# EAGLE board SparkFun_Lil_Soundie_Audio_Player-Panel_v10 (EAGLE 7.7.0), part 1 of 7
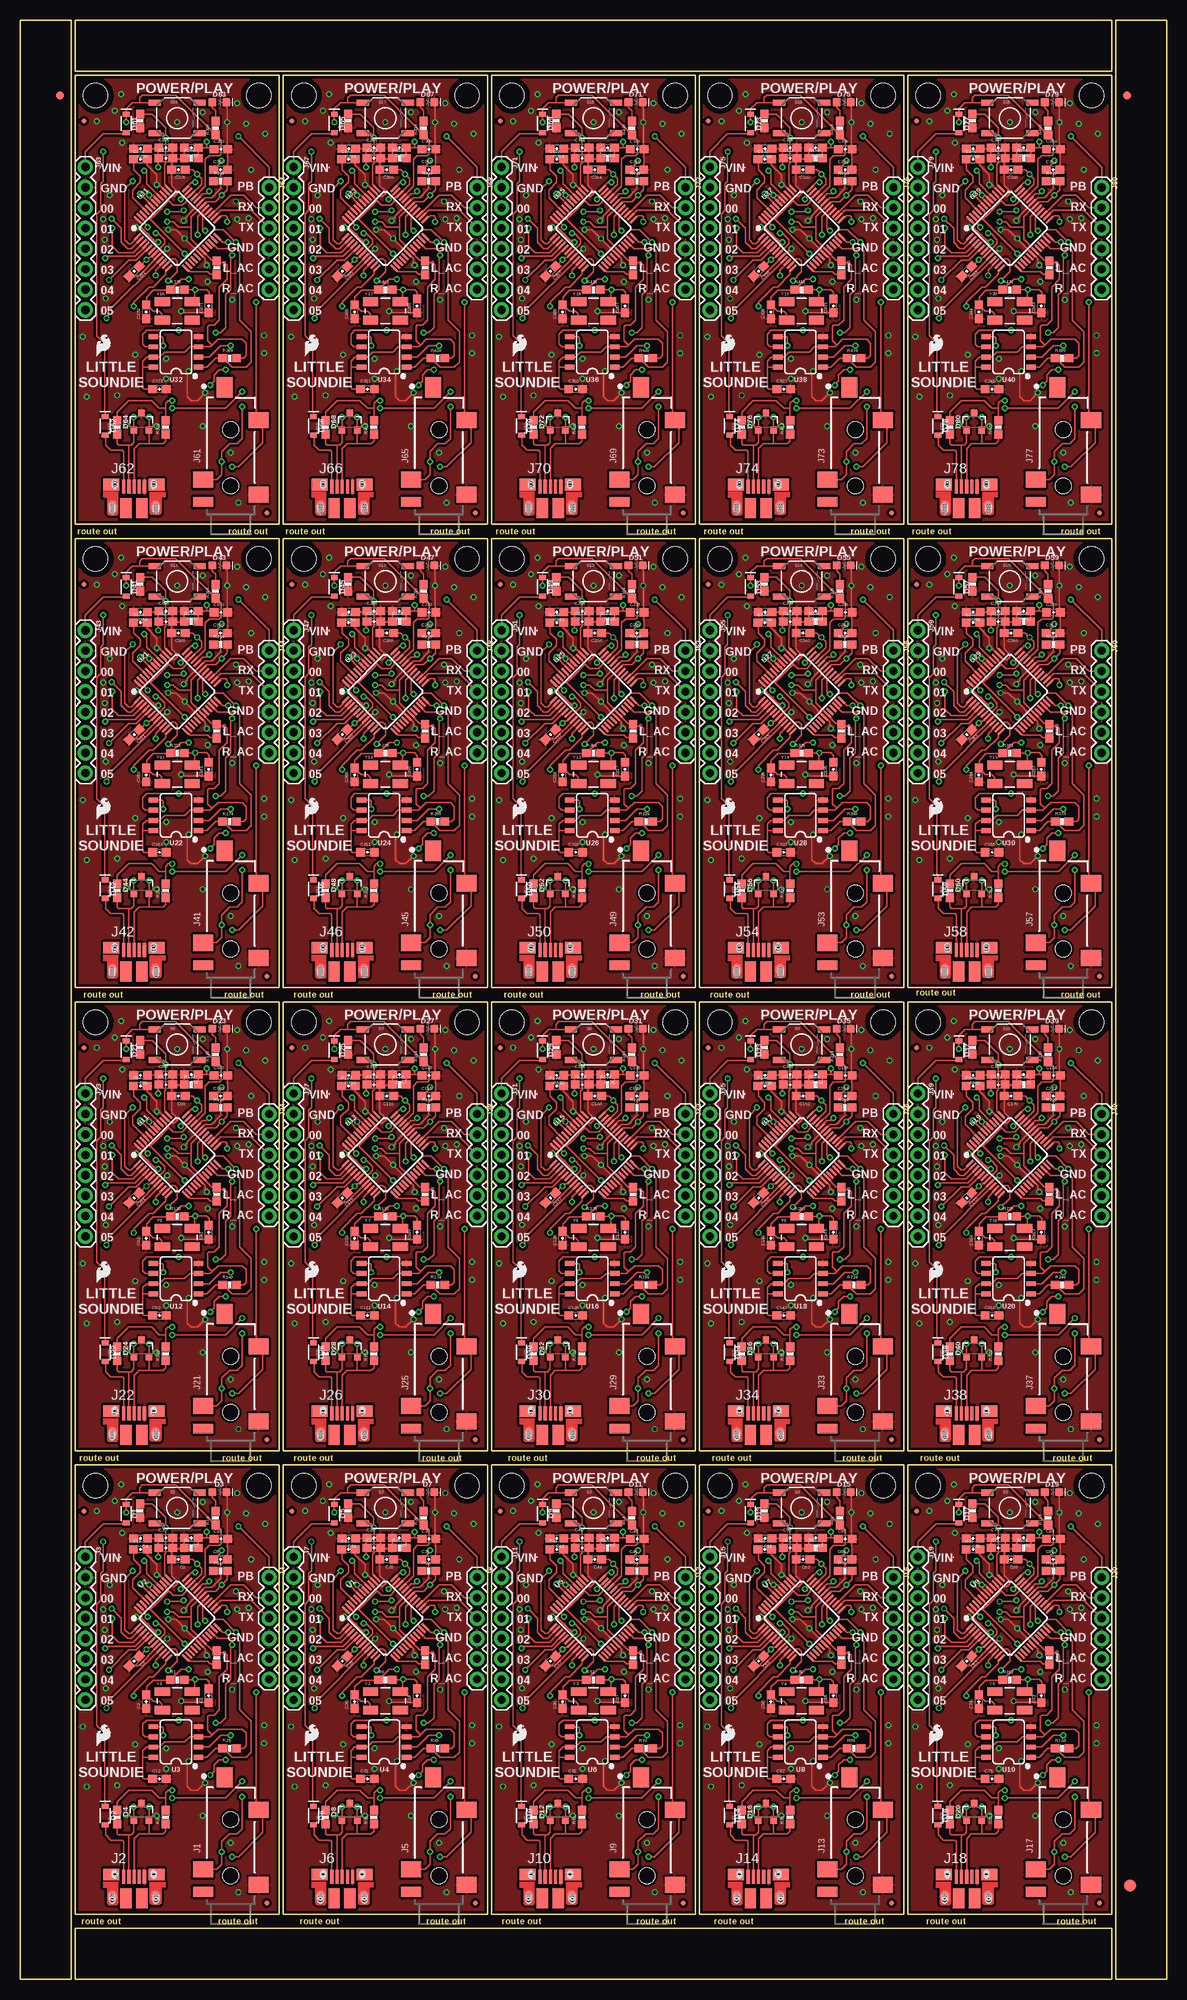
[diagram p0: board, top side]
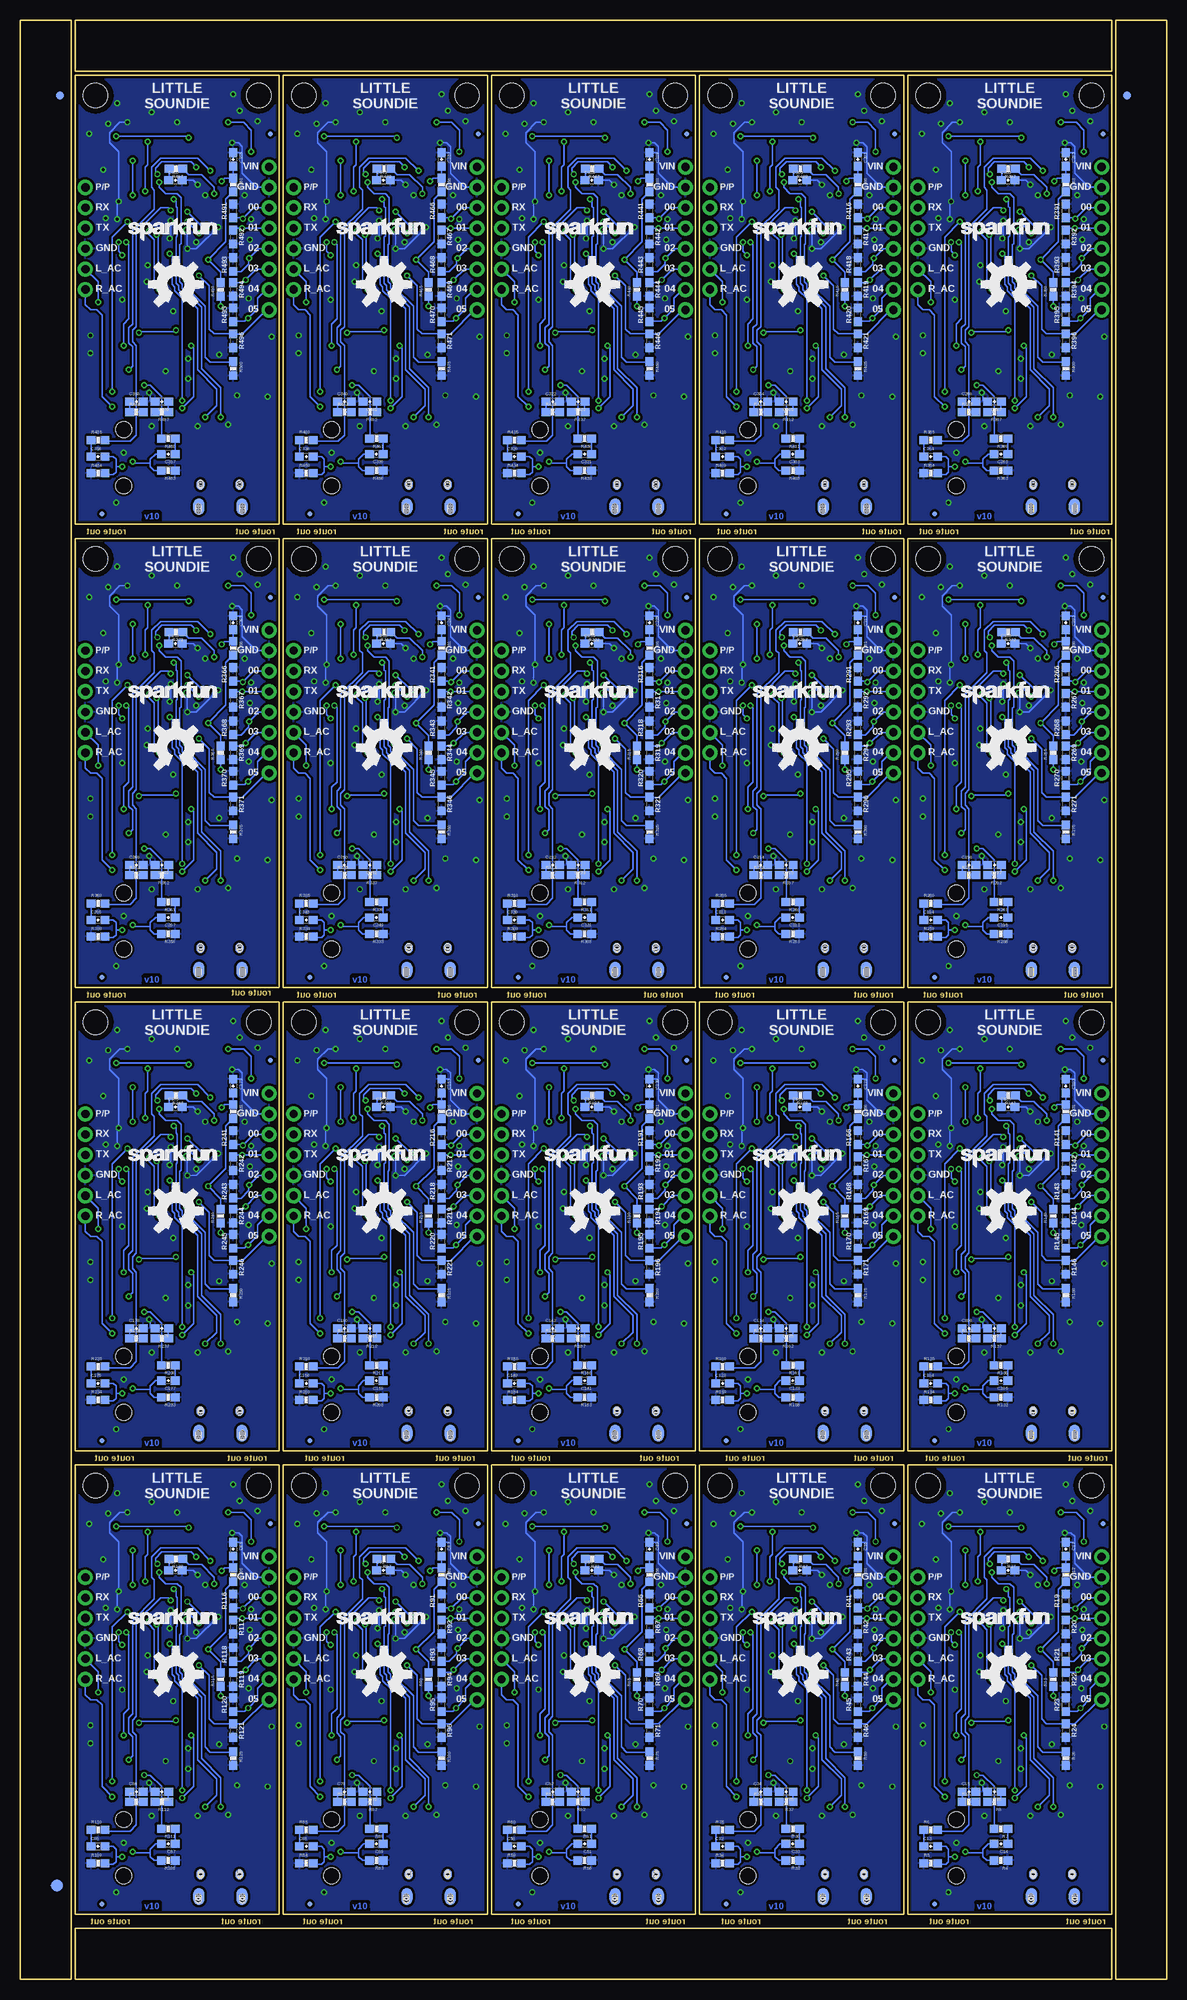
[diagram p1: board, bottom side, seen from below]

Size 142.75 x 243.84 mm. Coordinates in mm from the lower left corner, seen from the top.
Outline: 6.35,80.52 6.35,0 0,0 0,30.99
Outline: 0,28.45 0,243.84 6.35,243.84 6.35,77.98
Outline: 79.25,0 6.86,0 6.86,6.35 29.72,6.35
Outline: 27.18,6.35 135.89,6.35 135.89,0 76.71,0
Outline: 63.5,243.84 135.89,243.84 135.89,237.49 113.03,237.49
Outline: 115.57,237.49 6.86,237.49 6.86,243.84 66.04,243.84
Outline: 136.4,164.59 136.4,243.84 142.75,243.84 142.75,214.12
Outline: 142.75,216.66 142.75,0 136.4,0 136.4,167.13
Outline: 32.26,8.13 32.26,64.01 6.86,64.01 6.86,8.13 32.26,8.13
Outline: 58.17,8.13 58.17,64.01 32.77,64.01 32.77,8.13 58.17,8.13
Outline: 84.07,8.13 84.07,64.01 58.67,64.01 58.67,8.13 84.07,8.13
Outline: 109.98,8.13 109.98,64.01 84.58,64.01 84.58,8.13 109.98,8.13
Outline: 135.89,8.13 135.89,64.01 110.49,64.01 110.49,8.13 135.89,8.13
Outline: 32.26,65.79 32.26,121.67 6.86,121.67 6.86,65.79 32.26,65.79
Outline: 58.17,65.79 58.17,121.67 32.77,121.67 32.77,65.79 58.17,65.79
Outline: 84.07,65.79 84.07,121.67 58.67,121.67 58.67,65.79 84.07,65.79
Outline: 109.98,65.79 109.98,121.67 84.58,121.67 84.58,65.79 109.98,65.79
Outline: 135.89,65.79 135.89,121.67 110.49,121.67 110.49,65.79 135.89,65.79
Outline: 32.26,123.44 32.26,179.32 6.86,179.32 6.86,123.44 32.26,123.44
Outline: 58.17,123.44 58.17,179.32 32.77,179.32 32.77,123.44 58.17,123.44
Outline: 84.07,123.44 84.07,179.32 58.67,179.32 58.67,123.44 84.07,123.44
Outline: 109.98,123.44 109.98,179.32 84.58,179.32 84.58,123.44 109.98,123.44
Outline: 135.89,123.44 135.89,179.32 110.49,179.32 110.49,123.44 135.89,123.44
Outline: 32.26,181.1 32.26,236.98 6.86,236.98 6.86,181.1 32.26,181.1
Outline: 58.17,181.1 58.17,236.98 32.77,236.98 32.77,181.1 58.17,181.1
Outline: 84.07,181.1 84.07,236.98 58.67,236.98 58.67,181.1 84.07,181.1
Outline: 109.98,181.1 109.98,236.98 84.58,236.98 84.58,181.1 109.98,181.1
Outline: 135.89,181.1 135.89,236.98 110.49,236.98 110.49,181.1 135.89,181.1
Copper layers (1*16): Top 0.035mm / dielectric 1.5mm / Bottom 0.035mm
Design rules "SparkFun-2-layer-TIGHT": minimum track width 7mil, minimum drill 15mil, track to track 7mil, track to pad 7mil, pad to pad 7mil, via to via 7mil, smd to smd 7mil, copper to edge 7mil, drill to drill 7mil, minimum pad ring 7mil, minimum via ring 7mil, stop-mask expansion 4mil, vias tented up to drill 25mil, thermal gap 10mil

## Footprints (pad centres in the part's own frame; a part is rotated, then mirrored left to right if it is on the bottom)
0603-CAP = smd 1.1 x 1: 1 -0.85,0; 2 0.85,0
SOD-323 = smd 0.63 x 0.83: A 1.15,0; C -1.15,0
LED-0603 = smd 1 x 1: A -0.877,0; C 0.877,0
SOT23-3 = smd 0.8 x 0.9: 1 -0.95,-1; 2 0.95,-1; 3 0,1.1
FIDUCIAL-1X2 = smd 1 x 1: 1 0,0
FIDUCIAL-1.5X3 = smd 1.5 x 1.5: 1 0,0
FIDUCIAL-MICRO = smd 0.635 x 0.635: 1 0,0
STAND-OFF-TIGHT = hole 3.048: 0,0
AUDIO-JACK-3.5MM-SMD = smd 2 x 2.5: RING 4.3,3.45; SLEEVE 2.4,-3.45; TIP 11.7,-3.45 | smd 1.2 x 2.5: RSH 1.5,3.45 | smd 2.5 x 2: TSH 15.75,0.75 | hole 2: 3.5,0; 10.5,0
USB-MICROB-PTH = smd 0.4 x 1.75: D+ 0.031,1.331; D- -0.619,1.331; GND 1.331,1.331; ID 0.681,1.331; VBUS -1.269,1.331 | smd 1.4 x 2.1 bottom: P$1 2.701,-1.142; P$3 -2.659,-1.144 | smd 1 x 1.3: P$2 2.487,1.594; P$6 -2.368,1.604 | smd 1 x 1.3 bottom: P$4 -2.368,1.604; P$10 2.481,1.598 | smd 1.1 x 1.5: P$8 2.701,-1.142; P$12 -2.659,-1.144 | smd 2 x 1.46: SHEILD2 2.831,1.606; SHIELD -2.794,1.606 | smd 1.425 x 2.5: SHIELD3 -0.979,-1.349; SHIELD4 0.996,-1.352 | hole 0.7: -2.693,-1.134; -2.693,-1.3; -2.694,-1.499; -2.694,-1.664; 2.768,-1.134; 2.767,-1.303; 2.766,-1.496; 2.766,-1.664 | hole 0.66: -2.359,1.821; -2.349,1.691; -2.359,1.541; -2.354,1.432; 2.481,1.821; 2.491,1.691; 2.481,1.541; 2.486,1.432
1X08 = drill 1.016 pad 1.88: 1 0,0; 2 2.54,0; 3 5.08,0; 4 7.62,0; 5 10.16,0; 6 12.7,0; 7 15.24,0; 8 17.78,0
1X06 = drill 1.016 pad 1.88: 1 0,0; 2 2.54,0; 3 5.08,0; 4 7.62,0; 5 10.16,0; 6 12.7,0
0603-RES = smd 1.1 x 1: 1 -0.85,0; 2 0.85,0
0603 = smd 1.1 x 1: 1 -0.85,0; 2 0.85,0
TACTILE-SWITCH-SMD = smd 1.524 x 0.762: 1 -2.794,1.905; 2 2.794,1.905; 3 -2.794,-1.905; 4 2.794,-1.905
LQFP-48 = smd 0.254 x 1.143: 1 -2.75,-4.25; 2 -2.25,-4.25; 3 -1.75,-4.25; 4 -1.25,-4.25; 5 -0.75,-4.25; 6 -0.25,-4.25; 7 0.25,-4.25; 8 0.75,-4.25; 9 1.25,-4.25; 10 1.75,-4.25; 11 2.25,-4.25; 12 2.75,-4.25; 25 2.75,4.25; 26 2.25,4.25; 27 1.75,4.25; 28 1.25,4.25; 29 0.75,4.25; 30 0.25,4.25; 31 -0.25,4.25; 32 -0.75,4.25; 33 -1.25,4.25; 34 -1.75,4.25; 35 -2.25,4.25; 36 -2.75,4.25 | smd 1.143 x 0.254: 13 4.25,-2.75; 14 4.25,-2.25; 15 4.25,-1.75; 16 4.25,-1.25; 17 4.25,-0.75; 18 4.25,-0.25; 19 4.25,0.25; 20 4.25,0.75; 21 4.25,1.25; 22 4.25,1.75; 23 4.25,2.25; 24 4.25,2.75; 37 -4.25,2.75; 38 -4.25,2.25; 39 -4.25,1.75; 40 -4.25,1.25; 41 -4.25,0.75; 42 -4.25,0.25; 43 -4.25,-0.25; 44 -4.25,-0.75; 45 -4.25,-1.25; 46 -4.25,-1.75; 47 -4.25,-2.25; 48 -4.25,-2.75
SO08 = smd 0.6 x 1.2: 1 -1.905,-2.8; 2 -0.635,-2.8; 3 0.635,-2.8; 4 1.905,-2.8; 5 1.905,2.8; 6 0.635,2.8; 7 -0.635,2.8; 8 -1.905,2.8
CRYSTAL-SMD-5X3 = smd 1.9 x 1.1: 1 -1.85,-1.15; 2 1.85,-1.15; 3 1.85,1.15; 4 -1.85,1.15

## Placement (x,y rotation side)
C1  22pF  [0603-CAP]  23.5,35.31 90 top
C2  22pF  [0603-CAP]  15.72,34.58 90 top
C3  10uF  [0603-CAP]  18.13,54.96 0 top
C4  0.1uF  [0603-CAP]  15.01,54.87 180 top
C5  0.1uF  [0603-CAP]  18.13,53.69 0 top
C6  0.1uF  [0603-CAP]  19.72,52.26 180 top
C7  0.1uF  [0603-CAP]  21.3,54.96 180 top
C8  0.1uF  [0603-CAP]  24.96,52.26 0 top
C9  0.1uF  [0603-CAP]  14.2,39.6 225 top
C10  1.0uF  [0603-CAP]  24.99,54.82 0 top
C11  1.0uF  [0603-CAP]  14.96,53.55 0 top
C12  0.1uF  [0603-CAP]  17.34,24.96 0 top
C13  10uF  [0603-CAP]  29.4,16.54 0 bottom
C14  10uF  [0603-CAP]  20.67,16.86 180 bottom
C15  10nF  [0603-CAP]  24.64,23.37 0 bottom
C16  10nF  [0603-CAP]  21.46,23.37 180 bottom
C17  10uF  [0603-CAP]  12.57,53.53 270 bottom
C18  22pF  [0603-CAP]  49.4,35.31 90 top
C19  47nF  [0603-CAP]  19.78,50.93 0 bottom
C20  22pF  [0603-CAP]  41.62,34.58 90 top
C21  0.1uF  [0603-CAP]  43.24,24.96 0 top
C22  1.0uF  [0603-CAP]  40.87,53.55 0 top
C23  10uF  [0603-CAP]  44.04,54.96 0 top
C24  0.1uF  [0603-CAP]  40.92,54.87 180 top
C25  0.1uF  [0603-CAP]  44.04,53.69 0 top
C26  0.1uF  [0603-CAP]  45.62,52.26 180 top
C27  0.1uF  [0603-CAP]  47.21,54.96 180 top
C28  0.1uF  [0603-CAP]  50.86,52.26 0 top
C29  0.1uF  [0603-CAP]  40.11,39.6 225 top
C30  1.0uF  [0603-CAP]  50.9,54.82 0 top
C31  10uF  [0603-CAP]  38.48,53.53 270 bottom
C32  10uF  [0603-CAP]  55.31,16.54 0 bottom
C33  10uF  [0603-CAP]  46.58,16.86 180 bottom
C34  10nF  [0603-CAP]  50.55,23.37 0 bottom
C35  10nF  [0603-CAP]  47.37,23.37 180 bottom
C36  47nF  [0603-CAP]  45.69,50.93 0 bottom
C37  22pF  [0603-CAP]  75.31,35.31 90 top
C38  22pF  [0603-CAP]  67.53,34.58 90 top
C39  0.1uF  [0603-CAP]  69.15,24.96 0 top
C40  1.0uF  [0603-CAP]  66.78,53.55 0 top
C41  10uF  [0603-CAP]  69.95,54.96 0 top
C42  0.1uF  [0603-CAP]  66.82,54.87 180 top
C43  0.1uF  [0603-CAP]  69.95,53.69 0 top
C44  0.1uF  [0603-CAP]  71.53,52.26 180 top
C45  0.1uF  [0603-CAP]  73.12,54.96 180 top
C46  0.1uF  [0603-CAP]  76.77,52.26 0 top
C47  0.1uF  [0603-CAP]  66.02,39.6 225 top
C48  1.0uF  [0603-CAP]  76.8,54.82 0 top
C49  10uF  [0603-CAP]  64.39,53.53 270 bottom
C50  10uF  [0603-CAP]  81.22,16.54 0 bottom
C51  10uF  [0603-CAP]  72.49,16.86 180 bottom
C52  10nF  [0603-CAP]  76.45,23.37 0 bottom
C53  10nF  [0603-CAP]  73.28,23.37 180 bottom
C54  47nF  [0603-CAP]  71.6,50.93 0 bottom
C55  22pF  [0603-CAP]  101.22,35.31 90 top
C56  22pF  [0603-CAP]  93.44,34.58 90 top
C57  0.1uF  [0603-CAP]  95.06,24.96 0 top
C58  1.0uF  [0603-CAP]  92.69,53.55 0 top
C59  10uF  [0603-CAP]  95.85,54.96 0 top
C60  0.1uF  [0603-CAP]  92.73,54.87 180 top
C61  0.1uF  [0603-CAP]  95.85,53.69 0 top
C62  0.1uF  [0603-CAP]  97.44,52.26 180 top
C63  0.1uF  [0603-CAP]  99.03,54.96 180 top
C64  0.1uF  [0603-CAP]  102.68,52.26 0 top
C65  0.1uF  [0603-CAP]  91.93,39.6 225 top
C66  1.0uF  [0603-CAP]  102.71,54.82 0 top
C67  10uF  [0603-CAP]  90.3,53.53 270 bottom
C68  10uF  [0603-CAP]  107.12,16.54 0 bottom
C69  10uF  [0603-CAP]  98.39,16.86 180 bottom
C70  10nF  [0603-CAP]  102.36,23.37 0 bottom
C71  10nF  [0603-CAP]  99.19,23.37 180 bottom
C72  47nF  [0603-CAP]  97.5,50.93 0 bottom
C73  22pF  [0603-CAP]  127.13,35.31 90 top
C74  22pF  [0603-CAP]  119.35,34.58 90 top
C75  0.1uF  [0603-CAP]  120.97,24.96 0 top
C76  1.0uF  [0603-CAP]  118.59,53.55 0 top
C77  10uF  [0603-CAP]  121.76,54.96 0 top
C78  0.1uF  [0603-CAP]  118.64,54.87 180 top
C79  0.1uF  [0603-CAP]  121.76,53.69 0 top
C80  0.1uF  [0603-CAP]  123.35,52.26 180 top
C81  0.1uF  [0603-CAP]  124.94,54.96 180 top
C82  0.1uF  [0603-CAP]  128.59,52.26 0 top
C83  0.1uF  [0603-CAP]  117.84,39.6 225 top
C84  1.0uF  [0603-CAP]  128.62,54.82 0 top
C85  10uF  [0603-CAP]  116.2,53.53 270 bottom
C86  10uF  [0603-CAP]  133.03,16.54 0 bottom
C87  10uF  [0603-CAP]  124.3,16.86 180 bottom
C88  10nF  [0603-CAP]  128.27,23.37 0 bottom
C89  10nF  [0603-CAP]  125.09,23.37 180 bottom
C90  47nF  [0603-CAP]  123.41,50.93 0 bottom
C91  22pF  [0603-CAP]  23.5,92.96 90 top
C92  22pF  [0603-CAP]  15.72,92.23 90 top
C93  0.1uF  [0603-CAP]  17.34,82.61 0 top
C94  1.0uF  [0603-CAP]  14.96,111.2 0 top
C95  10uF  [0603-CAP]  18.13,112.62 0 top
C96  0.1uF  [0603-CAP]  15.01,112.53 180 top
C97  0.1uF  [0603-CAP]  18.13,111.35 0 top
C98  0.1uF  [0603-CAP]  19.72,109.92 180 top
C99  0.1uF  [0603-CAP]  21.3,112.62 180 top
C100  0.1uF  [0603-CAP]  24.96,109.92 0 top
C101  0.1uF  [0603-CAP]  14.2,97.26 225 top
C102  1.0uF  [0603-CAP]  24.99,112.47 0 top
C103  10uF  [0603-CAP]  12.57,111.19 270 bottom
C104  10uF  [0603-CAP]  29.4,74.2 0 bottom
C105  10uF  [0603-CAP]  20.67,74.52 180 bottom
C106  10nF  [0603-CAP]  24.64,81.03 0 bottom
C107  10nF  [0603-CAP]  21.46,81.03 180 bottom
C108  47nF  [0603-CAP]  19.78,108.58 0 bottom
C109  22pF  [0603-CAP]  49.4,92.96 90 top
C110  22pF  [0603-CAP]  41.62,92.23 90 top
C111  0.1uF  [0603-CAP]  43.24,82.61 0 top
C112  1.0uF  [0603-CAP]  40.87,111.2 0 top
C113  10uF  [0603-CAP]  44.04,112.62 0 top
C114  0.1uF  [0603-CAP]  40.92,112.53 180 top
C115  0.1uF  [0603-CAP]  44.04,111.35 0 top
C116  0.1uF  [0603-CAP]  45.62,109.92 180 top
C117  0.1uF  [0603-CAP]  47.21,112.62 180 top
C118  0.1uF  [0603-CAP]  50.86,109.92 0 top
C119  0.1uF  [0603-CAP]  40.11,97.26 225 top
C120  1.0uF  [0603-CAP]  50.9,112.47 0 top
C121  10uF  [0603-CAP]  38.48,111.19 270 bottom
C122  10uF  [0603-CAP]  55.31,74.2 0 bottom
C123  10uF  [0603-CAP]  46.58,74.52 180 bottom
C124  10nF  [0603-CAP]  50.55,81.03 0 bottom
C125  10nF  [0603-CAP]  47.37,81.03 180 bottom
C126  47nF  [0603-CAP]  45.69,108.58 0 bottom
C127  22pF  [0603-CAP]  75.31,92.96 90 top
C128  22pF  [0603-CAP]  67.53,92.23 90 top
C129  0.1uF  [0603-CAP]  69.15,82.61 0 top
C130  1.0uF  [0603-CAP]  66.78,111.2 0 top
C131  10uF  [0603-CAP]  69.95,112.62 0 top
C132  0.1uF  [0603-CAP]  66.82,112.53 180 top
C133  0.1uF  [0603-CAP]  69.95,111.35 0 top
C134  0.1uF  [0603-CAP]  71.53,109.92 180 top
C135  0.1uF  [0603-CAP]  73.12,112.62 180 top
C136  0.1uF  [0603-CAP]  76.77,109.92 0 top
C137  0.1uF  [0603-CAP]  66.02,97.26 225 top
C138  1.0uF  [0603-CAP]  76.8,112.47 0 top
C139  10uF  [0603-CAP]  64.39,111.19 270 bottom
C140  10uF  [0603-CAP]  81.22,74.2 0 bottom
C141  10uF  [0603-CAP]  72.49,74.52 180 bottom
C142  10nF  [0603-CAP]  76.45,81.03 0 bottom
C143  10nF  [0603-CAP]  73.28,81.03 180 bottom
C144  47nF  [0603-CAP]  71.6,108.58 0 bottom
C145  22pF  [0603-CAP]  101.22,92.96 90 top
C146  22pF  [0603-CAP]  93.44,92.23 90 top
C147  0.1uF  [0603-CAP]  95.06,82.61 0 top
C148  1.0uF  [0603-CAP]  92.69,111.2 0 top
C149  10uF  [0603-CAP]  95.85,112.62 0 top
C150  0.1uF  [0603-CAP]  92.73,112.53 180 top
C151  0.1uF  [0603-CAP]  95.85,111.35 0 top
C152  0.1uF  [0603-CAP]  97.44,109.92 180 top
C153  0.1uF  [0603-CAP]  99.03,112.62 180 top
C154  0.1uF  [0603-CAP]  102.68,109.92 0 top
C155  0.1uF  [0603-CAP]  91.93,97.26 225 top
C156  1.0uF  [0603-CAP]  102.71,112.47 0 top
C157  10uF  [0603-CAP]  90.3,111.19 270 bottom
C158  10uF  [0603-CAP]  107.12,74.2 0 bottom
C159  10uF  [0603-CAP]  98.39,74.52 180 bottom
C160  10nF  [0603-CAP]  102.36,81.03 0 bottom
C161  10nF  [0603-CAP]  99.19,81.03 180 bottom
C162  47nF  [0603-CAP]  97.5,108.58 0 bottom
C163  22pF  [0603-CAP]  127.13,92.96 90 top
C164  22pF  [0603-CAP]  119.35,92.23 90 top
C165  0.1uF  [0603-CAP]  120.97,82.61 0 top
C166  1.0uF  [0603-CAP]  118.59,111.2 0 top
C167  10uF  [0603-CAP]  121.76,112.62 0 top
C168  0.1uF  [0603-CAP]  118.64,112.53 180 top
C169  0.1uF  [0603-CAP]  121.76,111.35 0 top
C170  0.1uF  [0603-CAP]  123.35,109.92 180 top
C171  0.1uF  [0603-CAP]  124.94,112.62 180 top
C172  0.1uF  [0603-CAP]  128.59,109.92 0 top
C173  0.1uF  [0603-CAP]  117.84,97.26 225 top
C174  1.0uF  [0603-CAP]  128.62,112.47 0 top
C175  10uF  [0603-CAP]  116.2,111.19 270 bottom
C176  10uF  [0603-CAP]  133.03,74.2 0 bottom
C177  10uF  [0603-CAP]  124.3,74.52 180 bottom
C178  10nF  [0603-CAP]  128.27,81.03 0 bottom
C179  10nF  [0603-CAP]  125.09,81.03 180 bottom
C180  47nF  [0603-CAP]  123.41,108.58 0 bottom
C181  22pF  [0603-CAP]  23.5,150.62 90 top
C182  22pF  [0603-CAP]  15.72,149.89 90 top
C183  0.1uF  [0603-CAP]  17.34,140.27 0 top
C184  1.0uF  [0603-CAP]  14.96,168.86 0 top
C185  10uF  [0603-CAP]  18.13,170.28 0 top
C186  0.1uF  [0603-CAP]  15.01,170.18 180 top
C187  0.1uF  [0603-CAP]  18.13,169.01 0 top
C188  0.1uF  [0603-CAP]  19.72,167.58 180 top
C189  0.1uF  [0603-CAP]  21.3,170.28 180 top
C190  0.1uF  [0603-CAP]  24.96,167.58 0 top
C191  0.1uF  [0603-CAP]  14.2,154.92 225 top
C192  1.0uF  [0603-CAP]  24.99,170.13 0 top
C193  10uF  [0603-CAP]  12.57,168.85 270 bottom
C194  10uF  [0603-CAP]  29.4,131.86 0 bottom
C195  10uF  [0603-CAP]  20.67,132.18 180 bottom
C196  10nF  [0603-CAP]  24.64,138.68 0 bottom
C197  10nF  [0603-CAP]  21.46,138.68 180 bottom
C198  47nF  [0603-CAP]  19.78,166.24 0 bottom
C199  22pF  [0603-CAP]  49.4,150.62 90 top
C200  22pF  [0603-CAP]  41.62,149.89 90 top
C201  0.1uF  [0603-CAP]  43.24,140.27 0 top
C202  1.0uF  [0603-CAP]  40.87,168.86 0 top
C203  10uF  [0603-CAP]  44.04,170.28 0 top
C204  0.1uF  [0603-CAP]  40.92,170.18 180 top
C205  0.1uF  [0603-CAP]  44.04,169.01 0 top
C206  0.1uF  [0603-CAP]  45.62,167.58 180 top
C207  0.1uF  [0603-CAP]  47.21,170.28 180 top
C208  0.1uF  [0603-CAP]  50.86,167.58 0 top
C209  0.1uF  [0603-CAP]  40.11,154.92 225 top
C210  1.0uF  [0603-CAP]  50.9,170.13 0 top
C211  10uF  [0603-CAP]  38.48,168.85 270 bottom
C212  10uF  [0603-CAP]  55.31,131.86 0 bottom
C213  10uF  [0603-CAP]  46.58,132.18 180 bottom
C214  10nF  [0603-CAP]  50.55,138.68 0 bottom
C215  10nF  [0603-CAP]  47.37,138.68 180 bottom
C216  47nF  [0603-CAP]  45.69,166.24 0 bottom
C217  22pF  [0603-CAP]  75.31,150.62 90 top
C218  22pF  [0603-CAP]  67.53,149.89 90 top
C219  0.1uF  [0603-CAP]  69.15,140.27 0 top
C220  1.0uF  [0603-CAP]  66.78,168.86 0 top
C221  10uF  [0603-CAP]  69.95,170.28 0 top
C222  0.1uF  [0603-CAP]  66.82,170.18 180 top
C223  0.1uF  [0603-CAP]  69.95,169.01 0 top
C224  0.1uF  [0603-CAP]  71.53,167.58 180 top
C225  0.1uF  [0603-CAP]  73.12,170.28 180 top
C226  0.1uF  [0603-CAP]  76.77,167.58 0 top
C227  0.1uF  [0603-CAP]  66.02,154.92 225 top
C228  1.0uF  [0603-CAP]  76.8,170.13 0 top
C229  10uF  [0603-CAP]  64.39,168.85 270 bottom
C230  10uF  [0603-CAP]  81.22,131.86 0 bottom
C231  10uF  [0603-CAP]  72.49,132.18 180 bottom
C232  10nF  [0603-CAP]  76.45,138.68 0 bottom
C233  10nF  [0603-CAP]  73.28,138.68 180 bottom
C234  47nF  [0603-CAP]  71.6,166.24 0 bottom
C235  22pF  [0603-CAP]  101.22,150.62 90 top
C236  22pF  [0603-CAP]  93.44,149.89 90 top
C237  0.1uF  [0603-CAP]  95.06,140.27 0 top
C238  1.0uF  [0603-CAP]  92.69,168.86 0 top
C239  10uF  [0603-CAP]  95.85,170.28 0 top
C240  0.1uF  [0603-CAP]  92.73,170.18 180 top
C241  0.1uF  [0603-CAP]  95.85,169.01 0 top
C242  0.1uF  [0603-CAP]  97.44,167.58 180 top
C243  0.1uF  [0603-CAP]  99.03,170.28 180 top
C244  0.1uF  [0603-CAP]  102.68,167.58 0 top
C245  0.1uF  [0603-CAP]  91.93,154.92 225 top
C246  1.0uF  [0603-CAP]  102.71,170.13 0 top
C247  10uF  [0603-CAP]  90.3,168.85 270 bottom
C248  10uF  [0603-CAP]  107.12,131.86 0 bottom
C249  10uF  [0603-CAP]  98.39,132.18 180 bottom
C250  10nF  [0603-CAP]  102.36,138.68 0 bottom
C251  10nF  [0603-CAP]  99.19,138.68 180 bottom
C252  47nF  [0603-CAP]  97.5,166.24 0 bottom
C253  22pF  [0603-CAP]  127.13,150.62 90 top
C254  22pF  [0603-CAP]  119.35,149.89 90 top
C255  0.1uF  [0603-CAP]  120.97,140.27 0 top
C256  1.0uF  [0603-CAP]  118.59,168.86 0 top
C257  10uF  [0603-CAP]  121.76,170.28 0 top
C258  0.1uF  [0603-CAP]  118.64,170.18 180 top
C259  0.1uF  [0603-CAP]  121.76,169.01 0 top
C260  0.1uF  [0603-CAP]  123.35,167.58 180 top
C261  0.1uF  [0603-CAP]  124.94,170.28 180 top
C262  0.1uF  [0603-CAP]  128.59,167.58 0 top
C263  0.1uF  [0603-CAP]  117.84,154.92 225 top
C264  1.0uF  [0603-CAP]  128.62,170.13 0 top
C265  10uF  [0603-CAP]  116.2,168.85 270 bottom
C266  10uF  [0603-CAP]  133.03,131.86 0 bottom
C267  10uF  [0603-CAP]  124.3,132.18 180 bottom
C268  10nF  [0603-CAP]  128.27,138.68 0 bottom
C269  10nF  [0603-CAP]  125.09,138.68 180 bottom
C270  47nF  [0603-CAP]  123.41,166.24 0 bottom
C271  22pF  [0603-CAP]  23.5,208.28 90 top
C272  22pF  [0603-CAP]  15.72,207.55 90 top
C273  0.1uF  [0603-CAP]  17.34,197.93 0 top
C274  1.0uF  [0603-CAP]  14.96,226.52 0 top
C275  10uF  [0603-CAP]  18.13,227.93 0 top
C276  0.1uF  [0603-CAP]  15.01,227.84 180 top
C277  0.1uF  [0603-CAP]  18.13,226.66 0 top
C278  0.1uF  [0603-CAP]  19.72,225.23 180 top
C279  0.1uF  [0603-CAP]  21.3,227.93 180 top
C280  0.1uF  [0603-CAP]  24.96,225.23 0 top
C281  0.1uF  [0603-CAP]  14.2,212.58 225 top
C282  1.0uF  [0603-CAP]  24.99,227.79 0 top
C283  10uF  [0603-CAP]  12.57,226.5 270 bottom
C284  10uF  [0603-CAP]  29.4,189.52 0 bottom
C285  10uF  [0603-CAP]  20.67,189.83 180 bottom
C286  10nF  [0603-CAP]  24.64,196.34 0 bottom
C287  10nF  [0603-CAP]  21.46,196.34 180 bottom
C288  47nF  [0603-CAP]  19.78,223.9 0 bottom
C289  22pF  [0603-CAP]  49.4,208.28 90 top
C290  22pF  [0603-CAP]  41.62,207.55 90 top
C291  0.1uF  [0603-CAP]  43.24,197.93 0 top
C292  1.0uF  [0603-CAP]  40.87,226.52 0 top
C293  10uF  [0603-CAP]  44.04,227.93 0 top
C294  0.1uF  [0603-CAP]  40.92,227.84 180 top
C295  0.1uF  [0603-CAP]  44.04,226.66 0 top
C296  0.1uF  [0603-CAP]  45.62,225.23 180 top
C297  0.1uF  [0603-CAP]  47.21,227.93 180 top
C298  0.1uF  [0603-CAP]  50.86,225.23 0 top
C299  0.1uF  [0603-CAP]  40.11,212.58 225 top
C300  1.0uF  [0603-CAP]  50.9,227.79 0 top
C301  10uF  [0603-CAP]  38.48,226.5 270 bottom
C302  10uF  [0603-CAP]  55.31,189.52 0 bottom
C303  10uF  [0603-CAP]  46.58,189.83 180 bottom
C304  10nF  [0603-CAP]  50.55,196.34 0 bottom
C305  10nF  [0603-CAP]  47.37,196.34 180 bottom
C306  47nF  [0603-CAP]  45.69,223.9 0 bottom
C307  22pF  [0603-CAP]  75.31,208.28 90 top
C308  22pF  [0603-CAP]  67.53,207.55 90 top
C309  0.1uF  [0603-CAP]  69.15,197.93 0 top
C310  1.0uF  [0603-CAP]  66.78,226.52 0 top
C311  10uF  [0603-CAP]  69.95,227.93 0 top
C312  0.1uF  [0603-CAP]  66.82,227.84 180 top
C313  0.1uF  [0603-CAP]  69.95,226.66 0 top
C314  0.1uF  [0603-CAP]  71.53,225.23 180 top
C315  0.1uF  [0603-CAP]  73.12,227.93 180 top
C316  0.1uF  [0603-CAP]  76.77,225.23 0 top
C317  0.1uF  [0603-CAP]  66.02,212.58 225 top
C318  1.0uF  [0603-CAP]  76.8,227.79 0 top
C319  10uF  [0603-CAP]  64.39,226.5 270 bottom
C320  10uF  [0603-CAP]  81.22,189.52 0 bottom
C321  10uF  [0603-CAP]  72.49,189.83 180 bottom
C322  10nF  [0603-CAP]  76.45,196.34 0 bottom
C323  10nF  [0603-CAP]  73.28,196.34 180 bottom
C324  47nF  [0603-CAP]  71.6,223.9 0 bottom
C325  22pF  [0603-CAP]  101.22,208.28 90 top
C326  22pF  [0603-CAP]  93.44,207.55 90 top
C327  0.1uF  [0603-CAP]  95.06,197.93 0 top
C328  1.0uF  [0603-CAP]  92.69,226.52 0 top
C329  10uF  [0603-CAP]  95.85,227.93 0 top
C330  0.1uF  [0603-CAP]  92.73,227.84 180 top
C331  0.1uF  [0603-CAP]  95.85,226.66 0 top
C332  0.1uF  [0603-CAP]  97.44,225.23 180 top
C333  0.1uF  [0603-CAP]  99.03,227.93 180 top
C334  0.1uF  [0603-CAP]  102.68,225.23 0 top
C335  0.1uF  [0603-CAP]  91.93,212.58 225 top
C336  1.0uF  [0603-CAP]  102.71,227.79 0 top
C337  10uF  [0603-CAP]  90.3,226.5 270 bottom
C338  10uF  [0603-CAP]  107.12,189.52 0 bottom
C339  10uF  [0603-CAP]  98.39,189.83 180 bottom
C340  10nF  [0603-CAP]  102.36,196.34 0 bottom
C341  10nF  [0603-CAP]  99.19,196.34 180 bottom
C342  47nF  [0603-CAP]  97.5,223.9 0 bottom
C343  22pF  [0603-CAP]  127.13,208.28 90 top
C344  22pF  [0603-CAP]  119.35,207.55 90 top
C345  0.1uF  [0603-CAP]  120.97,197.93 0 top
C346  1.0uF  [0603-CAP]  118.59,226.52 0 top
C347  10uF  [0603-CAP]  121.76,227.93 0 top
C348  0.1uF  [0603-CAP]  118.64,227.84 180 top
C349  0.1uF  [0603-CAP]  121.76,226.66 0 top
C350  0.1uF  [0603-CAP]  123.35,225.23 180 top
C351  0.1uF  [0603-CAP]  124.94,227.93 180 top
C352  0.1uF  [0603-CAP]  128.59,225.23 0 top
C353  0.1uF  [0603-CAP]  117.84,212.58 225 top
C354  1.0uF  [0603-CAP]  128.62,227.79 0 top
C355  10uF  [0603-CAP]  116.2,226.5 270 bottom
C356  10uF  [0603-CAP]  133.03,189.52 0 bottom
C357  10uF  [0603-CAP]  124.3,189.83 180 bottom
C358  10nF  [0603-CAP]  128.27,196.34 0 bottom
C359  10nF  [0603-CAP]  125.09,196.34 180 bottom
C360  47nF  [0603-CAP]  123.41,223.9 0 bottom
D1  1A/23V/620mV  [SOD-323]  13.21,57.98 270 top
D2  1A/23V/620mV  [SOD-323]  10.6,20.38 270 top
D3  RED  [LED-0603]  24.8,60.64 0 top
D4  PESD1CAN  [SOT23-3]  15.11,20.83 0 top
D5  1A/23V/620mV  [SOD-323]  39.12,57.98 270 top
D6  1A/23V/620mV  [SOD-323]  36.51,20.38 270 top
D7  RED  [LED-0603]  50.7,60.64 0 top
D8  PESD1CAN  [SOT23-3]  41.02,20.83 0 top
D9  1A/23V/620mV  [SOD-323]  65.02,57.98 270 top
D10  1A/23V/620mV  [SOD-323]  62.42,20.38 270 top
D11  RED  [LED-0603]  76.61,60.64 0 top
D12  PESD1CAN  [SOT23-3]  66.93,20.83 0 top
D13  1A/23V/620mV  [SOD-323]  90.93,57.98 270 top
D14  1A/23V/620mV  [SOD-323]  88.33,20.38 270 top
D15  RED  [LED-0603]  102.52,60.64 0 top
D16  PESD1CAN  [SOT23-3]  92.84,20.83 0 top
D17  1A/23V/620mV  [SOD-323]  116.84,57.98 270 top
D18  1A/23V/620mV  [SOD-323]  114.24,20.38 270 top
D19  RED  [LED-0603]  128.43,60.64 0 top
D20  PESD1CAN  [SOT23-3]  118.75,20.83 0 top
D21  1A/23V/620mV  [SOD-323]  13.21,115.63 270 top
D22  1A/23V/620mV  [SOD-323]  10.6,78.04 270 top
D23  RED  [LED-0603]  24.8,118.3 0 top
D24  PESD1CAN  [SOT23-3]  15.11,78.49 0 top
D25  1A/23V/620mV  [SOD-323]  39.12,115.63 270 top
D26  1A/23V/620mV  [SOD-323]  36.51,78.04 270 top
D27  RED  [LED-0603]  50.7,118.3 0 top
D28  PESD1CAN  [SOT23-3]  41.02,78.49 0 top
D29  1A/23V/620mV  [SOD-323]  65.02,115.63 270 top
D30  1A/23V/620mV  [SOD-323]  62.42,78.04 270 top
D31  RED  [LED-0603]  76.61,118.3 0 top
D32  PESD1CAN  [SOT23-3]  66.93,78.49 0 top
D33  1A/23V/620mV  [SOD-323]  90.93,115.63 270 top
D34  1A/23V/620mV  [SOD-323]  88.33,78.04 270 top
D35  RED  [LED-0603]  102.52,118.3 0 top
D36  PESD1CAN  [SOT23-3]  92.84,78.49 0 top
D37  1A/23V/620mV  [SOD-323]  116.84,115.63 270 top
D38  1A/23V/620mV  [SOD-323]  114.24,78.04 270 top
D39  RED  [LED-0603]  128.43,118.3 0 top
D40  PESD1CAN  [SOT23-3]  118.75,78.49 0 top
D41  1A/23V/620mV  [SOD-323]  13.21,173.29 270 top
D42  1A/23V/620mV  [SOD-323]  10.6,135.7 270 top
D43  RED  [LED-0603]  24.8,175.96 0 top
D44  PESD1CAN  [SOT23-3]  15.11,136.14 0 top
D45  1A/23V/620mV  [SOD-323]  39.12,173.29 270 top
D46  1A/23V/620mV  [SOD-323]  36.51,135.7 270 top
D47  RED  [LED-0603]  50.7,175.96 0 top
D48  PESD1CAN  [SOT23-3]  41.02,136.14 0 top
D49  1A/23V/620mV  [SOD-323]  65.02,173.29 270 top
D50  1A/23V/620mV  [SOD-323]  62.42,135.7 270 top
D51  RED  [LED-0603]  76.61,175.96 0 top
D52  PESD1CAN  [SOT23-3]  66.93,136.14 0 top
D53  1A/23V/620mV  [SOD-323]  90.93,173.29 270 top
D54  1A/23V/620mV  [SOD-323]  88.33,135.7 270 top
D55  RED  [LED-0603]  102.52,175.96 0 top
D56  PESD1CAN  [SOT23-3]  92.84,136.14 0 top
D57  1A/23V/620mV  [SOD-323]  116.84,173.29 270 top
D58  1A/23V/620mV  [SOD-323]  114.24,135.7 270 top
D59  RED  [LED-0603]  128.43,175.96 0 top
D60  PESD1CAN  [SOT23-3]  118.75,136.14 0 top
D61  1A/23V/620mV  [SOD-323]  13.21,230.95 270 top
D62  1A/23V/620mV  [SOD-323]  10.6,193.36 270 top
D63  RED  [LED-0603]  24.8,233.62 0 top
D64  PESD1CAN  [SOT23-3]  15.11,193.8 0 top
D65  1A/23V/620mV  [SOD-323]  39.12,230.95 270 top
D66  1A/23V/620mV  [SOD-323]  36.51,193.36 270 top
D67  RED  [LED-0603]  50.7,233.62 0 top
D68  PESD1CAN  [SOT23-3]  41.02,193.8 0 top
D69  1A/23V/620mV  [SOD-323]  65.02,230.95 270 top
D70  1A/23V/620mV  [SOD-323]  62.42,193.36 270 top
D71  RED  [LED-0603]  76.61,233.62 0 top
D72  PESD1CAN  [SOT23-3]  66.93,193.8 0 top
D73  1A/23V/620mV  [SOD-323]  90.93,230.95 270 top
D74  1A/23V/620mV  [SOD-323]  88.33,193.36 270 top
D75  RED  [LED-0603]  102.52,233.62 0 top
D76  PESD1CAN  [SOT23-3]  92.84,193.8 0 top
D77  1A/23V/620mV  [SOD-323]  116.84,230.95 270 top
D78  1A/23V/620mV  [SOD-323]  114.24,193.36 270 top
D79  RED  [LED-0603]  128.43,233.62 0 top
D80  PESD1CAN  [SOT23-3]  118.75,193.8 0 top
E$1  [FIDUCIAL-1X2]  137.8,234.44 180 bottom
E$2  [FIDUCIAL-1X2]  4.95,234.44 0 bottom
E$3  [FIDUCIAL-1.5X3]  138.18,11.68 0 top
E$4  [FIDUCIAL-1.5X3]  138.18,11.68 0 bottom
E$6  [FIDUCIAL-1X2]  4.95,234.44 0 top
E$7  [FIDUCIAL-1X2]  137.8,234.44 180 top
FD1  FIDUCIALUFIDUCIAL  [FIDUCIAL-MICRO]  30.73,9.53 270 top
FD2  FIDUCIALUFIDUCIAL  [FIDUCIAL-MICRO]  7.94,58.29 270 top
FD3  FIDUCIALUFIDUCIAL  [FIDUCIAL-MICRO]  28.92,9.4 0 bottom
FD4  FIDUCIALUFIDUCIAL  [FIDUCIAL-MICRO]  7.97,56.71 0 bottom
FD5  FIDUCIALUFIDUCIAL  [FIDUCIAL-MICRO]  56.64,9.53 270 top
FD6  FIDUCIALUFIDUCIAL  [FIDUCIAL-MICRO]  33.85,58.29 270 top
FD7  FIDUCIALUFIDUCIAL  [FIDUCIAL-MICRO]  54.83,9.4 0 bottom
FD8  FIDUCIALUFIDUCIAL  [FIDUCIAL-MICRO]  33.88,56.71 0 bottom
FD9  FIDUCIALUFIDUCIAL  [FIDUCIAL-MICRO]  82.55,9.53 270 top
FD10  FIDUCIALUFIDUCIAL  [FIDUCIAL-MICRO]  59.75,58.29 270 top
FD11  FIDUCIALUFIDUCIAL  [FIDUCIAL-MICRO]  80.74,9.4 0 bottom
FD12  FIDUCIALUFIDUCIAL  [FIDUCIAL-MICRO]  59.79,56.71 0 bottom
FD13  FIDUCIALUFIDUCIAL  [FIDUCIAL-MICRO]  108.46,9.53 270 top
FD14  FIDUCIALUFIDUCIAL  [FIDUCIAL-MICRO]  85.66,58.29 270 top
FD15  FIDUCIALUFIDUCIAL  [FIDUCIAL-MICRO]  106.65,9.4 0 bottom
FD16  FIDUCIALUFIDUCIAL  [FIDUCIAL-MICRO]  85.69,56.71 0 bottom
FD17  FIDUCIALUFIDUCIAL  [FIDUCIAL-MICRO]  134.37,9.53 270 top
FD18  FIDUCIALUFIDUCIAL  [FIDUCIAL-MICRO]  111.57,58.29 270 top
FD19  FIDUCIALUFIDUCIAL  [FIDUCIAL-MICRO]  132.56,9.4 0 bottom
FD20  FIDUCIALUFIDUCIAL  [FIDUCIAL-MICRO]  111.6,56.71 0 bottom
FD21  FIDUCIALUFIDUCIAL  [FIDUCIAL-MICRO]  30.73,67.18 270 top
FD22  FIDUCIALUFIDUCIAL  [FIDUCIAL-MICRO]  7.94,115.95 270 top
FD23  FIDUCIALUFIDUCIAL  [FIDUCIAL-MICRO]  28.92,67.06 0 bottom
FD24  FIDUCIALUFIDUCIAL  [FIDUCIAL-MICRO]  7.97,114.36 0 bottom
FD25  FIDUCIALUFIDUCIAL  [FIDUCIAL-MICRO]  56.64,67.18 270 top
FD26  FIDUCIALUFIDUCIAL  [FIDUCIAL-MICRO]  33.85,115.95 270 top
FD27  FIDUCIALUFIDUCIAL  [FIDUCIAL-MICRO]  54.83,67.06 0 bottom
FD28  FIDUCIALUFIDUCIAL  [FIDUCIAL-MICRO]  33.88,114.36 0 bottom
FD29  FIDUCIALUFIDUCIAL  [FIDUCIAL-MICRO]  82.55,67.18 270 top
FD30  FIDUCIALUFIDUCIAL  [FIDUCIAL-MICRO]  59.75,115.95 270 top
FD31  FIDUCIALUFIDUCIAL  [FIDUCIAL-MICRO]  80.74,67.06 0 bottom
FD32  FIDUCIALUFIDUCIAL  [FIDUCIAL-MICRO]  59.79,114.36 0 bottom
FD33  FIDUCIALUFIDUCIAL  [FIDUCIAL-MICRO]  108.46,67.18 270 top
FD34  FIDUCIALUFIDUCIAL  [FIDUCIAL-MICRO]  85.66,115.95 270 top
FD35  FIDUCIALUFIDUCIAL  [FIDUCIAL-MICRO]  106.65,67.06 0 bottom
FD36  FIDUCIALUFIDUCIAL  [FIDUCIAL-MICRO]  85.69,114.36 0 bottom
FD37  FIDUCIALUFIDUCIAL  [FIDUCIAL-MICRO]  134.37,67.18 270 top
FD38  FIDUCIALUFIDUCIAL  [FIDUCIAL-MICRO]  111.57,115.95 270 top
FD39  FIDUCIALUFIDUCIAL  [FIDUCIAL-MICRO]  132.56,67.06 0 bottom
FD40  FIDUCIALUFIDUCIAL  [FIDUCIAL-MICRO]  111.6,114.36 0 bottom
FD41  FIDUCIALUFIDUCIAL  [FIDUCIAL-MICRO]  30.73,124.84 270 top
FD42  FIDUCIALUFIDUCIAL  [FIDUCIAL-MICRO]  7.94,173.61 270 top
FD43  FIDUCIALUFIDUCIAL  [FIDUCIAL-MICRO]  28.92,124.71 0 bottom
FD44  FIDUCIALUFIDUCIAL  [FIDUCIAL-MICRO]  7.97,172.02 0 bottom
FD45  FIDUCIALUFIDUCIAL  [FIDUCIAL-MICRO]  56.64,124.84 270 top
FD46  FIDUCIALUFIDUCIAL  [FIDUCIAL-MICRO]  33.85,173.61 270 top
FD47  FIDUCIALUFIDUCIAL  [FIDUCIAL-MICRO]  54.83,124.71 0 bottom
FD48  FIDUCIALUFIDUCIAL  [FIDUCIAL-MICRO]  33.88,172.02 0 bottom
FD49  FIDUCIALUFIDUCIAL  [FIDUCIAL-MICRO]  82.55,124.84 270 top
FD50  FIDUCIALUFIDUCIAL  [FIDUCIAL-MICRO]  59.75,173.61 270 top
FD51  FIDUCIALUFIDUCIAL  [FIDUCIAL-MICRO]  80.74,124.71 0 bottom
FD52  FIDUCIALUFIDUCIAL  [FIDUCIAL-MICRO]  59.79,172.02 0 bottom
FD53  FIDUCIALUFIDUCIAL  [FIDUCIAL-MICRO]  108.46,124.84 270 top
FD54  FIDUCIALUFIDUCIAL  [FIDUCIAL-MICRO]  85.66,173.61 270 top
FD55  FIDUCIALUFIDUCIAL  [FIDUCIAL-MICRO]  106.65,124.71 0 bottom
FD56  FIDUCIALUFIDUCIAL  [FIDUCIAL-MICRO]  85.69,172.02 0 bottom
FD57  FIDUCIALUFIDUCIAL  [FIDUCIAL-MICRO]  134.37,124.84 270 top
FD58  FIDUCIALUFIDUCIAL  [FIDUCIAL-MICRO]  111.57,173.61 270 top
FD59  FIDUCIALUFIDUCIAL  [FIDUCIAL-MICRO]  132.56,124.71 0 bottom
FD60  FIDUCIALUFIDUCIAL  [FIDUCIAL-MICRO]  111.6,172.02 0 bottom
FD61  FIDUCIALUFIDUCIAL  [FIDUCIAL-MICRO]  30.73,182.5 270 top
FD62  FIDUCIALUFIDUCIAL  [FIDUCIAL-MICRO]  7.94,231.27 270 top
FD63  FIDUCIALUFIDUCIAL  [FIDUCIAL-MICRO]  28.92,182.37 0 bottom
FD64  FIDUCIALUFIDUCIAL  [FIDUCIAL-MICRO]  7.97,229.68 0 bottom
FD65  FIDUCIALUFIDUCIAL  [FIDUCIAL-MICRO]  56.64,182.5 270 top
FD66  FIDUCIALUFIDUCIAL  [FIDUCIAL-MICRO]  33.85,231.27 270 top
FD67  FIDUCIALUFIDUCIAL  [FIDUCIAL-MICRO]  54.83,182.37 0 bottom
FD68  FIDUCIALUFIDUCIAL  [FIDUCIAL-MICRO]  33.88,229.68 0 bottom
FD69  FIDUCIALUFIDUCIAL  [FIDUCIAL-MICRO]  82.55,182.5 270 top
FD70  FIDUCIALUFIDUCIAL  [FIDUCIAL-MICRO]  59.75,231.27 270 top
FD71  FIDUCIALUFIDUCIAL  [FIDUCIAL-MICRO]  80.74,182.37 0 bottom
FD72  FIDUCIALUFIDUCIAL  [FIDUCIAL-MICRO]  59.79,229.68 0 bottom
FD73  FIDUCIALUFIDUCIAL  [FIDUCIAL-MICRO]  108.46,182.5 270 top
FD74  FIDUCIALUFIDUCIAL  [FIDUCIAL-MICRO]  85.66,231.27 270 top
FD75  FIDUCIALUFIDUCIAL  [FIDUCIAL-MICRO]  106.65,182.37 0 bottom
FD76  FIDUCIALUFIDUCIAL  [FIDUCIAL-MICRO]  85.69,229.68 0 bottom
FD77  FIDUCIALUFIDUCIAL  [FIDUCIAL-MICRO]  134.37,182.5 270 top
FD78  FIDUCIALUFIDUCIAL  [FIDUCIAL-MICRO]  111.57,231.27 270 top
FD79  FIDUCIALUFIDUCIAL  [FIDUCIAL-MICRO]  132.56,182.37 0 bottom
FD80  FIDUCIALUFIDUCIAL  [FIDUCIAL-MICRO]  111.6,229.68 0 bottom
H1  STAND-OFFTIGHT  [STAND-OFF-TIGHT]  9.4,61.47 270 top
H2  STAND-OFFTIGHT  [STAND-OFF-TIGHT]  35.31,61.47 270 top
H3  STAND-OFFTIGHT  [STAND-OFF-TIGHT]  55.63,61.47 270 top
H4  STAND-OFFTIGHT  [STAND-OFF-TIGHT]  29.72,61.47 270 top
H5  STAND-OFFTIGHT  [STAND-OFF-TIGHT]  61.21,61.47 270 top
H6  STAND-OFFTIGHT  [STAND-OFF-TIGHT]  81.53,61.47 270 top
H7  STAND-OFFTIGHT  [STAND-OFF-TIGHT]  87.12,61.47 270 top
H8  STAND-OFFTIGHT  [STAND-OFF-TIGHT]  107.44,61.47 270 top
H9  STAND-OFFTIGHT  [STAND-OFF-TIGHT]  113.03,61.47 270 top
H10  STAND-OFFTIGHT  [STAND-OFF-TIGHT]  133.35,61.47 270 top
H11  STAND-OFFTIGHT  [STAND-OFF-TIGHT]  9.4,119.13 270 top
H12  STAND-OFFTIGHT  [STAND-OFF-TIGHT]  29.72,119.13 270 top
H13  STAND-OFFTIGHT  [STAND-OFF-TIGHT]  35.31,119.13 270 top
H14  STAND-OFFTIGHT  [STAND-OFF-TIGHT]  55.63,119.13 270 top
H15  STAND-OFFTIGHT  [STAND-OFF-TIGHT]  61.21,119.13 270 top
H16  STAND-OFFTIGHT  [STAND-OFF-TIGHT]  81.53,119.13 270 top
H17  STAND-OFFTIGHT  [STAND-OFF-TIGHT]  87.12,119.13 270 top
H18  STAND-OFFTIGHT  [STAND-OFF-TIGHT]  107.44,119.13 270 top
H19  STAND-OFFTIGHT  [STAND-OFF-TIGHT]  113.03,119.13 270 top
H20  STAND-OFFTIGHT  [STAND-OFF-TIGHT]  133.35,119.13 270 top
H21  STAND-OFFTIGHT  [STAND-OFF-TIGHT]  9.4,176.78 270 top
H22  STAND-OFFTIGHT  [STAND-OFF-TIGHT]  29.72,176.78 270 top
H23  STAND-OFFTIGHT  [STAND-OFF-TIGHT]  35.31,176.78 270 top
H24  STAND-OFFTIGHT  [STAND-OFF-TIGHT]  55.63,176.78 270 top
H25  STAND-OFFTIGHT  [STAND-OFF-TIGHT]  61.21,176.78 270 top
H26  STAND-OFFTIGHT  [STAND-OFF-TIGHT]  81.53,176.78 270 top
H27  STAND-OFFTIGHT  [STAND-OFF-TIGHT]  87.12,176.78 270 top
H28  STAND-OFFTIGHT  [STAND-OFF-TIGHT]  107.44,176.78 270 top
H29  STAND-OFFTIGHT  [STAND-OFF-TIGHT]  113.03,176.78 270 top
H30  STAND-OFFTIGHT  [STAND-OFF-TIGHT]  133.35,176.78 270 top
H31  STAND-OFFTIGHT  [STAND-OFF-TIGHT]  9.4,234.44 270 top
H32  STAND-OFFTIGHT  [STAND-OFF-TIGHT]  29.72,234.44 270 top
H33  STAND-OFFTIGHT  [STAND-OFF-TIGHT]  35.31,234.44 270 top
H34  STAND-OFFTIGHT  [STAND-OFF-TIGHT]  55.63,234.44 270 top
H35  STAND-OFFTIGHT  [STAND-OFF-TIGHT]  61.21,234.44 270 top
H36  STAND-OFFTIGHT  [STAND-OFF-TIGHT]  81.53,234.44 270 top
H37  STAND-OFFTIGHT  [STAND-OFF-TIGHT]  87.12,234.44 270 top
H38  STAND-OFFTIGHT  [STAND-OFF-TIGHT]  107.44,234.44 270 top
H39  STAND-OFFTIGHT  [STAND-OFF-TIGHT]  113.03,234.44 270 top
H40  STAND-OFFTIGHT  [STAND-OFF-TIGHT]  133.35,234.44 270 top
J1  Audio Jack  [AUDIO-JACK-3.5MM-SMD]  26.23,9.4 90 top
J2  AMP FCI 10103594-0001LF  [USB-MICROB-PTH]  14.16,11.46 0 top
J3  [1X08]  8.13,52.58 270 top
J4  [1X06]  30.99,50.04 270 top
J5  Audio Jack  [AUDIO-JACK-3.5MM-SMD]  52.13,9.4 90 top
J6  AMP FCI 10103594-0001LF  [USB-MICROB-PTH]  40.07,11.46 0 top
J7  [1X08]  34.04,52.58 270 top
J8  [1X06]  56.9,50.04 270 top
J9  Audio Jack  [AUDIO-JACK-3.5MM-SMD]  78.04,9.4 90 top
J10  AMP FCI 10103594-0001LF  [USB-MICROB-PTH]  65.98,11.46 0 top
J11  [1X08]  59.94,52.58 270 top
J12  [1X06]  82.8,50.04 270 top
J13  Audio Jack  [AUDIO-JACK-3.5MM-SMD]  103.95,9.4 90 top
J14  AMP FCI 10103594-0001LF  [USB-MICROB-PTH]  91.88,11.46 0 top
J15  [1X08]  85.85,52.58 270 top
J16  [1X06]  108.71,50.04 270 top
J17  Audio Jack  [AUDIO-JACK-3.5MM-SMD]  129.86,9.4 90 top
J18  AMP FCI 10103594-0001LF  [USB-MICROB-PTH]  117.79,11.46 0 top
J19  [1X08]  111.76,52.58 270 top
J20  [1X06]  134.62,50.04 270 top
J21  Audio Jack  [AUDIO-JACK-3.5MM-SMD]  26.23,67.06 90 top
J22  AMP FCI 10103594-0001LF  [USB-MICROB-PTH]  14.16,69.12 0 top
J23  [1X08]  8.13,110.24 270 top
J24  [1X06]  30.99,107.7 270 top
J25  Audio Jack  [AUDIO-JACK-3.5MM-SMD]  52.13,67.06 90 top
J26  AMP FCI 10103594-0001LF  [USB-MICROB-PTH]  40.07,69.12 0 top
J27  [1X08]  34.04,110.24 270 top
J28  [1X06]  56.9,107.7 270 top
J29  Audio Jack  [AUDIO-JACK-3.5MM-SMD]  78.04,67.06 90 top
J30  AMP FCI 10103594-0001LF  [USB-MICROB-PTH]  65.98,69.12 0 top
J31  [1X08]  59.94,110.24 270 top
J32  [1X06]  82.8,107.7 270 top
J33  Audio Jack  [AUDIO-JACK-3.5MM-SMD]  103.95,67.06 90 top
J34  AMP FCI 10103594-0001LF  [USB-MICROB-PTH]  91.88,69.12 0 top
J35  [1X08]  85.85,110.24 270 top
J36  [1X06]  108.71,107.7 270 top
J37  Audio Jack  [AUDIO-JACK-3.5MM-SMD]  129.86,67.06 90 top
J38  AMP FCI 10103594-0001LF  [USB-MICROB-PTH]  117.79,69.12 0 top
J39  [1X08]  111.76,110.24 270 top
J40  [1X06]  134.62,107.7 270 top
J41  Audio Jack  [AUDIO-JACK-3.5MM-SMD]  26.23,124.71 90 top
J42  AMP FCI 10103594-0001LF  [USB-MICROB-PTH]  14.16,126.78 0 top
J43  [1X08]  8.13,167.89 270 top
J44  [1X06]  30.99,165.35 270 top
J45  Audio Jack  [AUDIO-JACK-3.5MM-SMD]  52.13,124.71 90 top
J46  AMP FCI 10103594-0001LF  [USB-MICROB-PTH]  40.07,126.78 0 top
J47  [1X08]  34.04,167.89 270 top
J48  [1X06]  56.9,165.35 270 top
J49  Audio Jack  [AUDIO-JACK-3.5MM-SMD]  78.04,124.71 90 top
J50  AMP FCI 10103594-0001LF  [USB-MICROB-PTH]  65.98,126.78 0 top
J51  [1X08]  59.94,167.89 270 top
J52  [1X06]  82.8,165.35 270 top
J53  Audio Jack  [AUDIO-JACK-3.5MM-SMD]  103.95,124.71 90 top
J54  AMP FCI 10103594-0001LF  [USB-MICROB-PTH]  91.88,126.78 0 top
J55  [1X08]  85.85,167.89 270 top
J56  [1X06]  108.71,165.35 270 top
J57  Audio Jack  [AUDIO-JACK-3.5MM-SMD]  129.86,124.71 90 top
J58  AMP FCI 10103594-0001LF  [USB-MICROB-PTH]  117.79,126.78 0 top
J59  [1X08]  111.76,167.89 270 top
J60  [1X06]  134.62,165.35 270 top
J61  Audio Jack  [AUDIO-JACK-3.5MM-SMD]  26.23,182.37 90 top
J62  AMP FCI 10103594-0001LF  [USB-MICROB-PTH]  14.16,184.44 0 top
J63  [1X08]  8.13,225.55 270 top
J64  [1X06]  30.99,223.01 270 top
J65  Audio Jack  [AUDIO-JACK-3.5MM-SMD]  52.13,182.37 90 top
J66  AMP FCI 10103594-0001LF  [USB-MICROB-PTH]  40.07,184.44 0 top
J67  [1X08]  34.04,225.55 270 top
J68  [1X06]  56.9,223.01 270 top
J69  Audio Jack  [AUDIO-JACK-3.5MM-SMD]  78.04,182.37 90 top
J70  AMP FCI 10103594-0001LF  [USB-MICROB-PTH]  65.98,184.44 0 top
J71  [1X08]  59.94,225.55 270 top
J72  [1X06]  82.8,223.01 270 top
J73  Audio Jack  [AUDIO-JACK-3.5MM-SMD]  103.95,182.37 90 top
J74  AMP FCI 10103594-0001LF  [USB-MICROB-PTH]  91.88,184.44 0 top
J75  [1X08]  85.85,225.55 270 top
J76  [1X06]  108.71,223.01 270 top
J77  Audio Jack  [AUDIO-JACK-3.5MM-SMD]  129.86,182.37 90 top
J78  AMP FCI 10103594-0001LF  [USB-MICROB-PTH]  117.79,184.44 0 top
J79  [1X08]  111.76,225.55 270 top
J80  [1X06]  134.62,223.01 270 top
LOGO1  OSHW-LOGOL  [OSHW-LOGO-L]  19.72,37.97 0 bottom
LOGO2  SFE_LOGO_NAME.1_INCH  [SFE_LOGO_NAME_.1]  26.07,42.89 0 bottom
LOGO3  OSHW-LOGOL  [OSHW-LOGO-L]  45.62,37.97 0 bottom
LOGO4  SFE_LOGO_NAME.1_INCH  [SFE_LOGO_NAME_.1]  51.97,42.89 0 bottom
LOGO5  OSHW-LOGOL  [OSHW-LOGO-L]  71.53,37.97 0 bottom
LOGO6  SFE_LOGO_NAME.1_INCH  [SFE_LOGO_NAME_.1]  77.88,42.89 0 bottom
LOGO7  OSHW-LOGOL  [OSHW-LOGO-L]  97.44,37.97 0 bottom
LOGO8  SFE_LOGO_NAME.1_INCH  [SFE_LOGO_NAME_.1]  103.79,42.89 0 bottom
LOGO9  OSHW-LOGOL  [OSHW-LOGO-L]  123.35,37.97 0 bottom
LOGO10  SFE_LOGO_NAME.1_INCH  [SFE_LOGO_NAME_.1]  129.7,42.89 0 bottom
LOGO11  OSHW-LOGOL  [OSHW-LOGO-L]  19.72,95.63 0 bottom
LOGO12  SFE_LOGO_NAME.1_INCH  [SFE_LOGO_NAME_.1]  26.07,100.55 0 bottom
LOGO13  OSHW-LOGOL  [OSHW-LOGO-L]  45.62,95.63 0 bottom
LOGO14  SFE_LOGO_NAME.1_INCH  [SFE_LOGO_NAME_.1]  51.97,100.55 0 bottom
LOGO15  OSHW-LOGOL  [OSHW-LOGO-L]  71.53,95.63 0 bottom
LOGO16  SFE_LOGO_NAME.1_INCH  [SFE_LOGO_NAME_.1]  77.88,100.55 0 bottom
LOGO17  OSHW-LOGOL  [OSHW-LOGO-L]  97.44,95.63 0 bottom
LOGO18  SFE_LOGO_NAME.1_INCH  [SFE_LOGO_NAME_.1]  103.79,100.55 0 bottom
LOGO19  OSHW-LOGOL  [OSHW-LOGO-L]  123.35,95.63 0 bottom
LOGO20  SFE_LOGO_NAME.1_INCH  [SFE_LOGO_NAME_.1]  129.7,100.55 0 bottom
LOGO21  OSHW-LOGOL  [OSHW-LOGO-L]  19.72,153.29 0 bottom
LOGO22  SFE_LOGO_NAME.1_INCH  [SFE_LOGO_NAME_.1]  26.07,158.21 0 bottom
LOGO23  OSHW-LOGOL  [OSHW-LOGO-L]  45.62,153.29 0 bottom
LOGO24  SFE_LOGO_NAME.1_INCH  [SFE_LOGO_NAME_.1]  51.97,158.21 0 bottom
LOGO25  OSHW-LOGOL  [OSHW-LOGO-L]  71.53,153.29 0 bottom
LOGO26  SFE_LOGO_NAME.1_INCH  [SFE_LOGO_NAME_.1]  77.88,158.21 0 bottom
LOGO27  OSHW-LOGOL  [OSHW-LOGO-L]  97.44,153.29 0 bottom
LOGO28  SFE_LOGO_NAME.1_INCH  [SFE_LOGO_NAME_.1]  103.79,158.21 0 bottom
LOGO29  OSHW-LOGOL  [OSHW-LOGO-L]  123.35,153.29 0 bottom
LOGO30  SFE_LOGO_NAME.1_INCH  [SFE_LOGO_NAME_.1]  129.7,158.21 0 bottom
LOGO31  OSHW-LOGOL  [OSHW-LOGO-L]  19.72,210.95 0 bottom
LOGO32  SFE_LOGO_NAME.1_INCH  [SFE_LOGO_NAME_.1]  26.07,215.87 0 bottom
LOGO33  OSHW-LOGOL  [OSHW-LOGO-L]  45.62,210.95 0 bottom
LOGO34  SFE_LOGO_NAME.1_INCH  [SFE_LOGO_NAME_.1]  51.97,215.87 0 bottom
LOGO35  OSHW-LOGOL  [OSHW-LOGO-L]  71.53,210.95 0 bottom
LOGO36  SFE_LOGO_NAME.1_INCH  [SFE_LOGO_NAME_.1]  77.88,215.87 0 bottom
LOGO37  OSHW-LOGOL  [OSHW-LOGO-L]  97.44,210.95 0 bottom
LOGO38  SFE_LOGO_NAME.1_INCH  [SFE_LOGO_NAME_.1]  103.79,215.87 0 bottom
LOGO39  OSHW-LOGOL  [OSHW-LOGO-L]  123.35,210.95 0 bottom
LOGO40  SFE_LOGO_NAME.1_INCH  [SFE_LOGO_NAME_.1]  129.7,215.87 0 bottom
R1  1M  [0603-RES]  19.56,37.29 0 top
R2  1M  [0603-RES]  12.1,20.19 90 top
R3  1M  [0603-RES]  18.13,20.19 90 top
R4  10K  [0603-RES]  20.67,14.8 180 bottom
R5  10K  [0603-RES]  29.4,14.48 0 bottom
R6  470  [0603-RES]  29.4,18.61 0 bottom
R7  470  [0603-RES]  20.67,18.76 180 bottom
R8  20  [0603-RES]  21.46,22.1 180 bottom
R9  1M  [0603-RES]  45.47,37.29 0 top
R10  20  [0603-RES]  24.64,22.1 0 bottom
R11  100k  [0603-RES]  24.96,50.83 0 top
R12  100k  [0603-RES]  12.57,50.36 270 bottom
R13  100k  [0603-RES]  14.16,37.34 90 bottom
R14  180  [0603-RES]  24.32,57.44 90 top
R15  1M  [0603-RES]  21.3,53.69 0 top
R16  1M  [0603-RES]  38,20.19 90 top
R17  150K  [0603-RES]  14.92,58.32 90 top
R18  100k  [0603-RES]  24.48,40.04 270 top
R19  100k  [0603]  12.57,47.1 90 bottom
R20  100k  [0603]  12.57,43.87 270 bottom
R21  100k  [0603]  12.57,40.44 90 bottom
R22  100k  [0603]  12.57,37.34 270 bottom
R23  100k  [0603]  12.57,34.19 90 bottom
R24  100k  [0603]  12.57,30.96 270 bottom
R25  100k  [0603-RES]  26.07,28.77 0 top
R26  100k  [0603-RES]  12.57,27.5 270 bottom
R27  10  [0603-RES]  19.72,52.36 180 bottom
R28  1M  [0603-RES]  44.04,20.19 90 top
R29  100k  [0603-RES]  50.86,50.83 0 top
R30  1M  [0603-RES]  47.21,53.69 0 top
R31  100k  [0603-RES]  38.48,50.36 270 bottom
R32  150K  [0603-RES]  40.83,58.32 90 top
R33  10K  [0603-RES]  46.58,14.8 180 bottom
R34  10K  [0603-RES]  55.31,14.48 0 bottom
R35  470  [0603-RES]  55.31,18.61 0 bottom
R36  470  [0603-RES]  46.58,18.76 180 bottom
R37  20  [0603-RES]  47.37,22.1 180 bottom
R38  20  [0603-RES]  50.55,22.1 0 bottom
R39  180  [0603-RES]  50.23,57.44 90 top
R40  100k  [0603-RES]  40.07,37.34 90 bottom
R41  100k  [0603]  38.48,47.1 90 bottom
R42  100k  [0603]  38.48,43.87 270 bottom
R43  100k  [0603]  38.48,40.44 90 bottom
R44  100k  [0603]  38.48,37.34 270 bottom
R45  100k  [0603]  38.48,34.19 90 bottom
R46  100k  [0603]  38.48,30.96 270 bottom
R47  10  [0603-RES]  45.62,52.36 180 bottom
R48  100k  [0603-RES]  50.39,40.04 270 top
R49  100k  [0603-RES]  51.97,28.77 0 top
R50  100k  [0603-RES]  38.48,27.5 270 bottom
R51  1M  [0603-RES]  71.37,37.29 0 top
R52  1M  [0603-RES]  63.91,20.19 90 top
R53  1M  [0603-RES]  69.95,20.19 90 top
R54  100k  [0603-RES]  76.77,50.83 0 top
R55  1M  [0603-RES]  73.12,53.69 0 top
R56  100k  [0603-RES]  64.39,50.36 270 bottom
R57  150K  [0603-RES]  66.74,58.32 90 top
R58  10K  [0603-RES]  72.49,14.8 180 bottom
R59  10K  [0603-RES]  81.22,14.48 0 bottom
R60  470  [0603-RES]  81.22,18.61 0 bottom
R61  470  [0603-RES]  72.49,18.76 180 bottom
R62  20  [0603-RES]  73.28,22.1 180 bottom
R63  20  [0603-RES]  76.45,22.1 0 bottom
R64  180  [0603-RES]  76.14,57.44 90 top
R65  100k  [0603-RES]  65.98,37.34 90 bottom
R66  100k  [0603]  64.39,47.1 90 bottom
R67  100k  [0603]  64.39,43.87 270 bottom
R68  100k  [0603]  64.39,40.44 90 bottom
R69  100k  [0603]  64.39,37.34 270 bottom
R70  100k  [0603]  64.39,34.19 90 bottom
R71  100k  [0603]  64.39,30.96 270 bottom
R72  10  [0603-RES]  71.53,52.36 180 bottom
R73  100k  [0603-RES]  76.3,40.04 270 top
R74  100k  [0603-RES]  77.88,28.77 0 top
R75  100k  [0603-RES]  64.39,27.5 270 bottom
R76  1M  [0603-RES]  97.28,37.29 0 top
R77  1M  [0603-RES]  89.82,20.19 90 top
R78  1M  [0603-RES]  95.85,20.19 90 top
R79  100k  [0603-RES]  102.68,50.83 0 top
R80  1M  [0603-RES]  99.03,53.69 0 top
R81  100k  [0603-RES]  90.3,50.36 270 bottom
R82  150K  [0603-RES]  92.65,58.32 90 top
R83  10K  [0603-RES]  98.39,14.8 180 bottom
R84  10K  [0603-RES]  107.12,14.48 0 bottom
R85  470  [0603-RES]  107.12,18.61 0 bottom
R86  470  [0603-RES]  98.39,18.76 180 bottom
R87  20  [0603-RES]  99.19,22.1 180 bottom
R88  20  [0603-RES]  102.36,22.1 0 bottom
R89  180  [0603-RES]  102.04,57.44 90 top
R90  100k  [0603-RES]  91.88,37.34 90 bottom
R91  100k  [0603]  90.3,47.1 90 bottom
R92  100k  [0603]  90.3,43.87 270 bottom
R93  100k  [0603]  90.3,40.44 90 bottom
R94  100k  [0603]  90.3,37.34 270 bottom
R95  100k  [0603]  90.3,34.19 90 bottom
R96  100k  [0603]  90.3,30.96 270 bottom
R97  10  [0603-RES]  97.44,52.36 180 bottom
R98  100k  [0603-RES]  102.2,40.04 270 top
R99  100k  [0603-RES]  103.79,28.77 0 top
R100  100k  [0603-RES]  90.3,27.5 270 bottom
R101  1M  [0603-RES]  123.19,37.29 0 top
R102  1M  [0603-RES]  115.73,20.19 90 top
R103  1M  [0603-RES]  121.76,20.19 90 top
R104  100k  [0603-RES]  128.59,50.83 0 top
R105  1M  [0603-RES]  124.94,53.69 0 top
R106  100k  [0603-RES]  116.2,50.36 270 bottom
R107  150K  [0603-RES]  118.55,58.32 90 top
R108  10K  [0603-RES]  124.3,14.8 180 bottom
R109  10K  [0603-RES]  133.03,14.48 0 bottom
R110  470  [0603-RES]  133.03,18.61 0 bottom
R111  470  [0603-RES]  124.3,18.76 180 bottom
R112  20  [0603-RES]  125.09,22.1 180 bottom
R113  20  [0603-RES]  128.27,22.1 0 bottom
R114  180  [0603-RES]  127.95,57.44 90 top
R115  100k  [0603-RES]  117.79,37.34 90 bottom
R116  100k  [0603]  116.2,47.1 90 bottom
R117  100k  [0603]  116.2,43.87 270 bottom
R118  100k  [0603]  116.2,40.44 90 bottom
R119  100k  [0603]  116.2,37.34 270 bottom
R120  100k  [0603]  116.2,34.19 90 bottom
R121  100k  [0603]  116.2,30.96 270 bottom
R122  10  [0603-RES]  123.35,52.36 180 bottom
R123  100k  [0603-RES]  128.11,40.04 270 top
R124  100k  [0603-RES]  129.7,28.77 0 top
R125  100k  [0603-RES]  116.2,27.5 270 bottom
R126  1M  [0603-RES]  19.56,94.95 0 top
R127  1M  [0603-RES]  12.1,77.85 90 top
R128  1M  [0603-RES]  18.13,77.85 90 top
R129  100k  [0603-RES]  24.96,108.49 0 top
R130  1M  [0603-RES]  21.3,111.35 0 top
R131  100k  [0603-RES]  12.57,108.01 270 bottom
R132  150K  [0603-RES]  14.92,115.98 90 top
R133  10K  [0603-RES]  20.67,72.45 180 bottom
R134  10K  [0603-RES]  29.4,72.14 0 bottom
R135  470  [0603-RES]  29.4,76.26 0 bottom
R136  470  [0603-RES]  20.67,76.42 180 bottom
R137  20  [0603-RES]  21.46,79.76 180 bottom
R138  20  [0603-RES]  24.64,79.76 0 bottom
R139  180  [0603-RES]  24.32,115.09 90 top
R140  100k  [0603-RES]  14.16,95 90 bottom
R141  100k  [0603]  12.57,104.76 90 bottom
R142  100k  [0603]  12.57,101.52 270 bottom
R143  100k  [0603]  12.57,98.09 90 bottom
R144  100k  [0603]  12.57,95 270 bottom
R145  100k  [0603]  12.57,91.85 90 bottom
R146  100k  [0603]  12.57,88.62 270 bottom
R147  10  [0603-RES]  19.72,110.01 180 bottom
R148  100k  [0603-RES]  24.48,97.69 270 top
R149  100k  [0603-RES]  26.07,86.42 0 top
R150  100k  [0603-RES]  12.57,85.15 270 bottom
R151  1M  [0603-RES]  45.47,94.95 0 top
R152  1M  [0603-RES]  38,77.85 90 top
R153  1M  [0603-RES]  44.04,77.85 90 top
R154  100k  [0603-RES]  50.86,108.49 0 top
R155  1M  [0603-RES]  47.21,111.35 0 top
R156  100k  [0603-RES]  38.48,108.01 270 bottom
R157  150K  [0603-RES]  40.83,115.98 90 top
R158  10K  [0603-RES]  46.58,72.45 180 bottom
R159  10K  [0603-RES]  55.31,72.14 0 bottom
R160  470  [0603-RES]  55.31,76.26 0 bottom
R161  470  [0603-RES]  46.58,76.42 180 bottom
R162  20  [0603-RES]  47.37,79.76 180 bottom
R163  20  [0603-RES]  50.55,79.76 0 bottom
R164  180  [0603-RES]  50.23,115.09 90 top
R165  100k  [0603-RES]  40.07,95 90 bottom
R166  100k  [0603]  38.48,104.76 90 bottom
R167  100k  [0603]  38.48,101.52 270 bottom
R168  100k  [0603]  38.48,98.09 90 bottom
R169  100k  [0603]  38.48,95 270 bottom
R170  100k  [0603]  38.48,91.85 90 bottom
R171  100k  [0603]  38.48,88.62 270 bottom
R172  10  [0603-RES]  45.62,110.01 180 bottom
R173  100k  [0603-RES]  50.39,97.69 270 top
R174  100k  [0603-RES]  51.97,86.42 0 top
R175  100k  [0603-RES]  38.48,85.15 270 bottom
R176  1M  [0603-RES]  71.37,94.95 0 top
R177  1M  [0603-RES]  63.91,77.85 90 top
R178  1M  [0603-RES]  69.95,77.85 90 top
R179  100k  [0603-RES]  76.77,108.49 0 top
R180  1M  [0603-RES]  73.12,111.35 0 top
R181  100k  [0603-RES]  64.39,108.01 270 bottom
R182  150K  [0603-RES]  66.74,115.98 90 top
R183  10K  [0603-RES]  72.49,72.45 180 bottom
R184  10K  [0603-RES]  81.22,72.14 0 bottom
R185  470  [0603-RES]  81.22,76.26 0 bottom
R186  470  [0603-RES]  72.49,76.42 180 bottom
R187  20  [0603-RES]  73.28,79.76 180 bottom
R188  20  [0603-RES]  76.45,79.76 0 bottom
R189  180  [0603-RES]  76.14,115.09 90 top
R190  100k  [0603-RES]  65.98,95 90 bottom
R191  100k  [0603]  64.39,104.76 90 bottom
R192  100k  [0603]  64.39,101.52 270 bottom
R193  100k  [0603]  64.39,98.09 90 bottom
R194  100k  [0603]  64.39,95 270 bottom
R195  100k  [0603]  64.39,91.85 90 bottom
R196  100k  [0603]  64.39,88.62 270 bottom
R197  10  [0603-RES]  71.53,110.01 180 bottom
R198  100k  [0603-RES]  76.3,97.69 270 top
R199  100k  [0603-RES]  77.88,86.42 0 top
R200  100k  [0603-RES]  64.39,85.15 270 bottom
R201  1M  [0603-RES]  97.28,94.95 0 top
R202  1M  [0603-RES]  89.82,77.85 90 top
R203  1M  [0603-RES]  95.85,77.85 90 top
R204  100k  [0603-RES]  102.68,108.49 0 top
R205  1M  [0603-RES]  99.03,111.35 0 top
R206  100k  [0603-RES]  90.3,108.01 270 bottom
R207  150K  [0603-RES]  92.65,115.98 90 top
R208  10K  [0603-RES]  98.39,72.45 180 bottom
R209  10K  [0603-RES]  107.12,72.14 0 bottom
R210  470  [0603-RES]  107.12,76.26 0 bottom
R211  470  [0603-RES]  98.39,76.42 180 bottom
R212  20  [0603-RES]  99.19,79.76 180 bottom
R213  20  [0603-RES]  102.36,79.76 0 bottom
R214  180  [0603-RES]  102.04,115.09 90 top
R215  100k  [0603-RES]  91.88,95 90 bottom
R216  100k  [0603]  90.3,104.76 90 bottom
R217  100k  [0603]  90.3,101.52 270 bottom
R218  100k  [0603]  90.3,98.09 90 bottom
R219  100k  [0603]  90.3,95 270 bottom
R220  100k  [0603]  90.3,91.85 90 bottom
R221  100k  [0603]  90.3,88.62 270 bottom
R222  10  [0603-RES]  97.44,110.01 180 bottom
R223  100k  [0603-RES]  102.2,97.69 270 top
R224  100k  [0603-RES]  103.79,86.42 0 top
R225  100k  [0603-RES]  90.3,85.15 270 bottom
R226  1M  [0603-RES]  123.19,94.95 0 top
R227  1M  [0603-RES]  115.73,77.85 90 top
R228  1M  [0603-RES]  121.76,77.85 90 top
R229  100k  [0603-RES]  128.59,108.49 0 top
R230  1M  [0603-RES]  124.94,111.35 0 top
R231  100k  [0603-RES]  116.2,108.01 270 bottom
R232  150K  [0603-RES]  118.55,115.98 90 top
R233  10K  [0603-RES]  124.3,72.45 180 bottom
R234  10K  [0603-RES]  133.03,72.14 0 bottom
R235  470  [0603-RES]  133.03,76.26 0 bottom
R236  470  [0603-RES]  124.3,76.42 180 bottom
R237  20  [0603-RES]  125.09,79.76 180 bottom
R238  20  [0603-RES]  128.27,79.76 0 bottom
R239  180  [0603-RES]  127.95,115.09 90 top
R240  100k  [0603-RES]  117.79,95 90 bottom
R241  100k  [0603]  116.2,104.76 90 bottom
R242  100k  [0603]  116.2,101.52 270 bottom
R243  100k  [0603]  116.2,98.09 90 bottom
R244  100k  [0603]  116.2,95 270 bottom
R245  100k  [0603]  116.2,91.85 90 bottom
R246  100k  [0603]  116.2,88.62 270 bottom
R247  10  [0603-RES]  123.35,110.01 180 bottom
R248  100k  [0603-RES]  128.11,97.69 270 top
R249  100k  [0603-RES]  129.7,86.42 0 top
R250  100k  [0603-RES]  116.2,85.15 270 bottom
R251  1M  [0603-RES]  19.56,152.6 0 top
R252  1M  [0603-RES]  12.1,135.51 90 top
R253  1M  [0603-RES]  18.13,135.51 90 top
R254  100k  [0603-RES]  24.96,166.15 0 top
R255  1M  [0603-RES]  21.3,169.01 0 top
R256  100k  [0603-RES]  12.57,165.67 270 bottom
R257  150K  [0603-RES]  14.92,173.64 90 top
R258  10K  [0603-RES]  20.67,130.11 180 bottom
R259  10K  [0603-RES]  29.4,129.79 0 bottom
R260  470  [0603-RES]  29.4,133.92 0 bottom
R261  470  [0603-RES]  20.67,134.08 180 bottom
R262  20  [0603-RES]  21.46,137.41 180 bottom
R263  20  [0603-RES]  24.64,137.41 0 bottom
R264  180  [0603-RES]  24.32,172.75 90 top
R265  100k  [0603-RES]  14.16,152.65 90 bottom
R266  100k  [0603]  12.57,162.42 90 bottom
R267  100k  [0603]  12.57,159.18 270 bottom
R268  100k  [0603]  12.57,155.75 90 bottom
R269  100k  [0603]  12.57,152.65 270 bottom
R270  100k  [0603]  12.57,149.5 90 bottom
R271  100k  [0603]  12.57,146.28 270 bottom
R272  10  [0603-RES]  19.72,167.67 180 bottom
R273  100k  [0603-RES]  24.48,155.35 270 top
R274  100k  [0603-RES]  26.07,144.08 0 top
R275  100k  [0603-RES]  12.57,142.81 270 bottom
R276  1M  [0603-RES]  45.47,152.6 0 top
R277  1M  [0603-RES]  38,135.51 90 top
R278  1M  [0603-RES]  44.04,135.51 90 top
R279  100k  [0603-RES]  50.86,166.15 0 top
R280  1M  [0603-RES]  47.21,169.01 0 top
R281  100k  [0603-RES]  38.48,165.67 270 bottom
R282  150K  [0603-RES]  40.83,173.64 90 top
R283  10K  [0603-RES]  46.58,130.11 180 bottom
R284  10K  [0603-RES]  55.31,129.79 0 bottom
R285  470  [0603-RES]  55.31,133.92 0 bottom
R286  470  [0603-RES]  46.58,134.08 180 bottom